# Altium PCB AD9959.PcbDoc
Units mm, origin at the board's own origin, x right, y up, seen from the top; angles counter-clockwise.
Board outline 55 x 88 mm, 2 copper layers (Top Layer, Bottom Layer); 116 components, 67 nets, 361 pads, 715 vias.
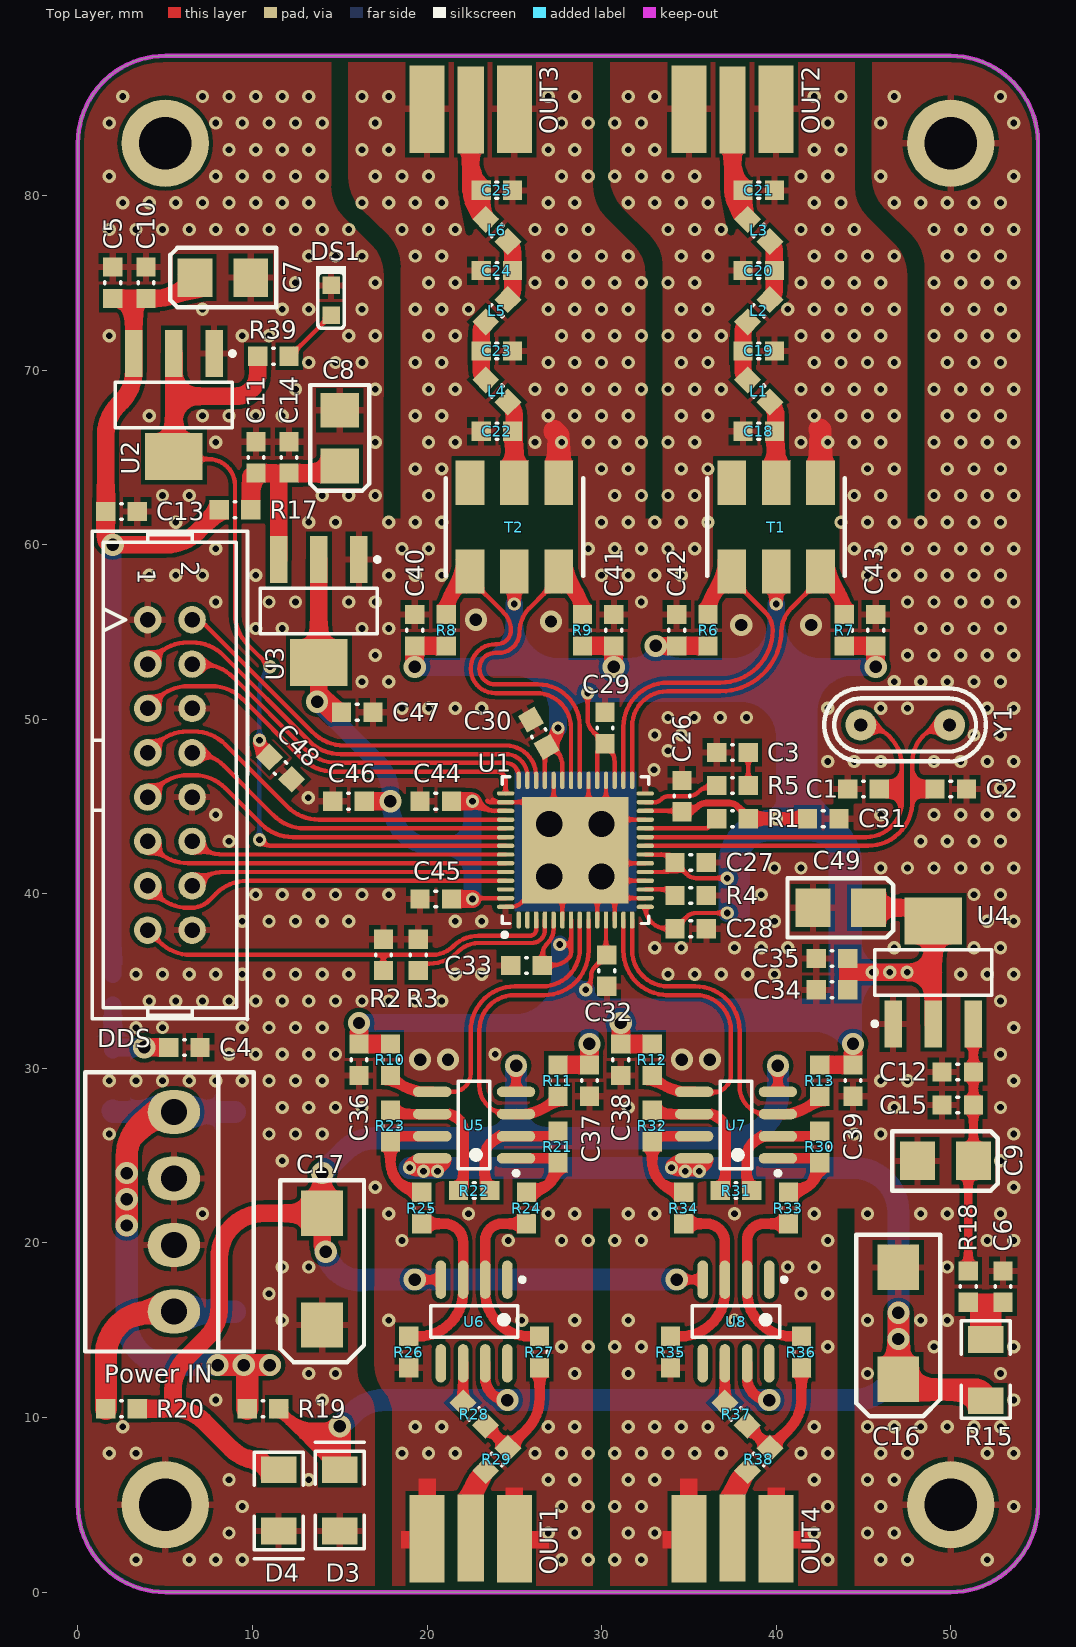
[diagram p0: Top Layer view]
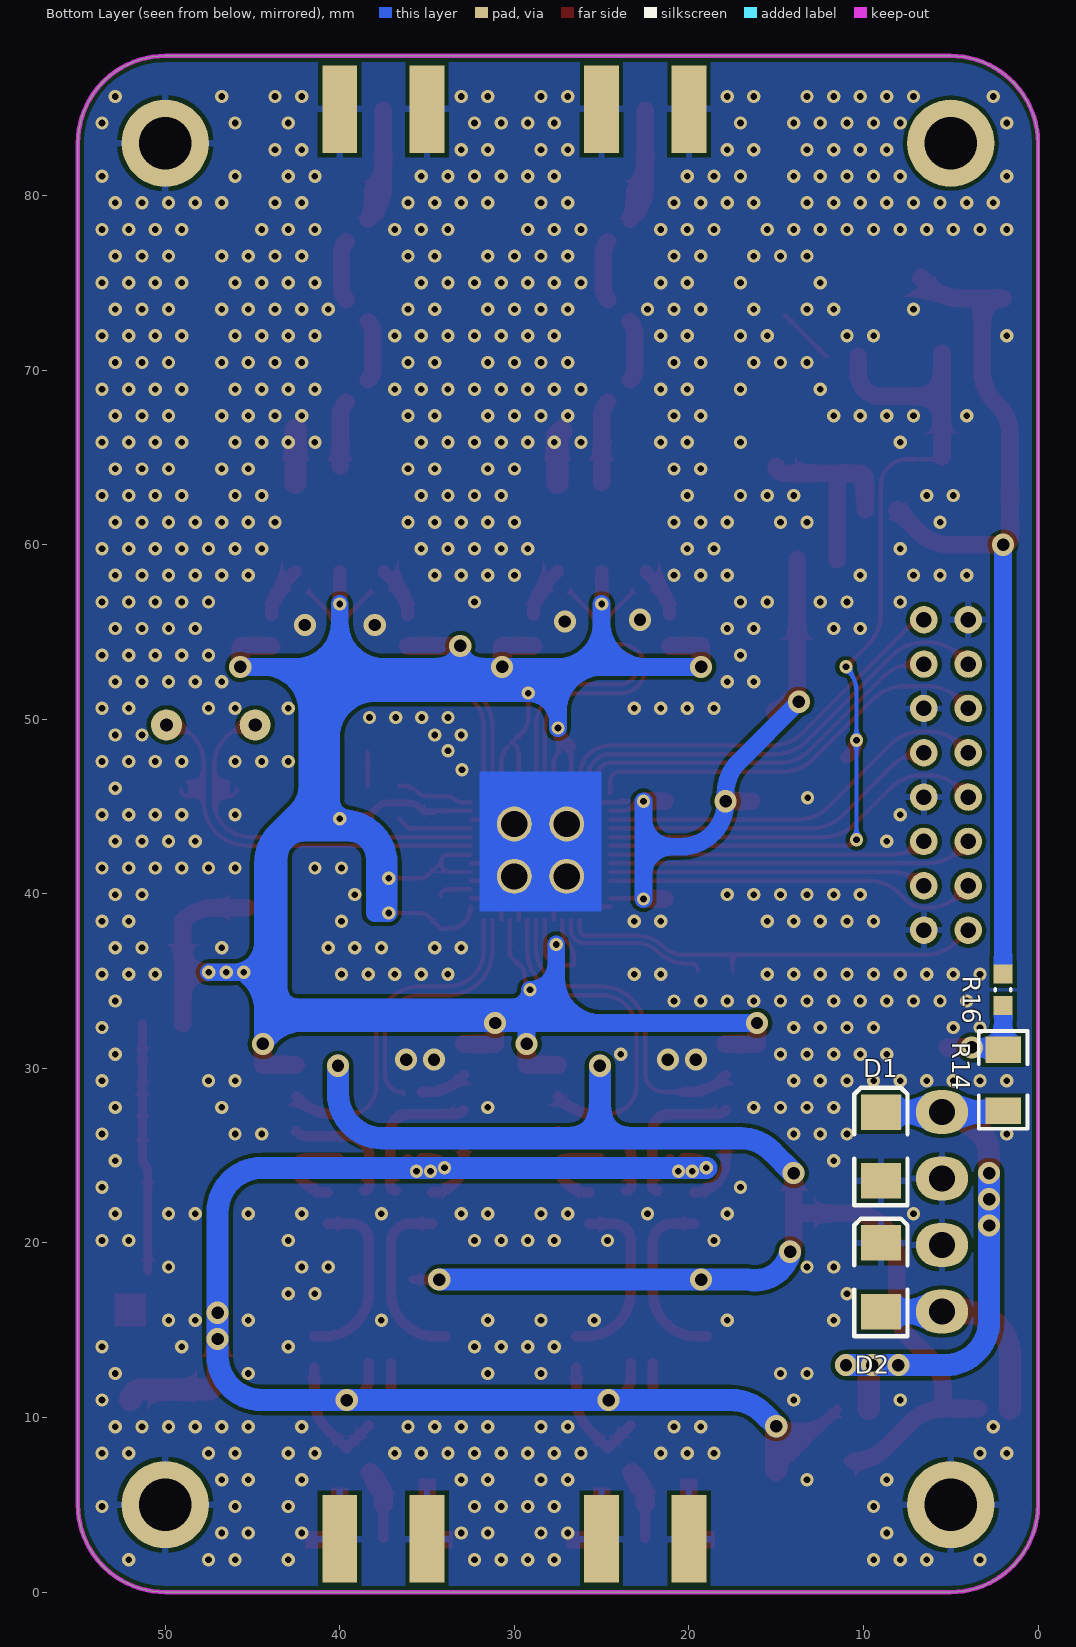
[diagram p1: Bottom Layer view, seen from below]

## Layer stack, top to bottom
Top Solder: solder mask 0.0102, Solder Resist, Dk 3.5
Top Layer: signal copper 0.0356
Dielectric 1: dielectric 0.32, FR-4, Dk 4.8
Bottom Layer: signal copper 0.0356
Bottom Solder: solder mask 0.0102, Solder Resist, Dk 3.5

## Board outline
0,5 0,83 cw(c5,83) 5,88 50,88 cw(c50,83) 55,83 55,5 cw(c50,5) 50,0 5,0 cw(c5,5)

## Design rules (kind name [scope] priority, off if disabled: settings)
Clearance [All] p1: gap=0.152 except(0.229: Arc-Poly Track-Poly SMDPad-Poly THPad-Poly Via-Poly Fill-Poly Poly-Poly Poly-Region Poly-Text)
HoleSize [All] p1: absolutevalues=TRUE maxlimit=254 minlimit=0.305 maxpercent=80.000 minpercent=20.000
MinimumSolderMaskSliver [All] p1: minsoldermaskwidth=0.025
PolygonConnect PolygonConnect_1 [IsVia] p1: connectstyle=Direct reliefconductorwidth=0.254 reliefentries=4 polygonreliefangle="90 Angle" airgapwidth=0.254
PolygonConnect [All] p2: connectstyle=Relief reliefconductorwidth=0.381 reliefentries=4 polygonreliefangle="90 Angle" airgapwidth=0.254
RoutingVias [All] p1: holewidth=0.381 width=0.762 viastyle="Through Hole" minholewidth=0.305 minwidth=0.635 maxholewidth=711.2 maxwidth=2539.975
SilkToSilkClearance [All] p1: silktosilkclearance=0.025
SilkToSolderMaskClearance [IsPad] p1: minsilkscreentomaskgap=0.076 clearancetoexposedcopper=TRUE
SolderMaskExpansion [All] p1: expansion=0.102
Width [All] p1: maxlimit=254 minlimit=0.152 preferedwidth=0.254 minimp=50.000000 maximp=50.000000 favimp=50.000000
26 further rules are at their usual default settings.

## Classes and differential pairs
component class "Decoupling Caps": C26 C27 C28 C29 C30 C31 C32 C33 C34 C35 C36 C37 C38 C39 C40 C41 C42 C43 C44 C45 C46 C47 C48 C49
component class OUTPUT: C18 C19 C20 C21 C22 C23 C24 C25 L1 L2 L3 L4 L5 L6 OUT1 OUT2 OUT3 OUT4 R21 R22 R23 R24 R25 R26 R27 R28 R29 R30 R31 R32 R33 R34 R35 R36 R37 R38 T1 T2 U5 U6 U7 U8
component class AD9959: C1 C2 C3 C4 C5 C6 C7 C8 C9 C10 C11 C12 C13 C14 C15 C16 C17 D1 D2 D3 D4 DDS DS1 "Power IN" R1 R2 R3 R4 R5 R6 R7 R8 R9 R10 R11 R12 R13 R14 R15 R16 R17 R18 R19 R20 R39 U1 U2 U3 U4 Y1

## Components (designator, comment, footprint, x,y, rotation, side; value= is the part's Value field where it differs from the comment)
C1 "39pF" CAPC0603(1608)55_M 45,46 r0 top
C2 "39pF" CAPC0603(1608)55_M 50,46 r180 top
C3 "680pF" CAPC0603(1608)55_M 37.5,48.1 r180 top
C4 "100nF" CAPC0603(1608)55_M 6.1,31.2 r180 top
C5 "100nF" CAPC0603(1608)55_M 2,75 r270 top
C6 "100nF" CAPC0603(1608)55_M 53,17.5 r270 top
C7 "10uF" CAPC3528 8.3,75.3 r0 top
C8 "10uF" CAPC3528 15,66.1 r90 top
C9 "10uF" CAPC3528 49.7,24.7 r180 top
C10 "100nF" CAPC0603(1608)55_M 3.9,75 r270 top
C11 "100nF" CAPC0603(1608)55_M 10.2,65 r270 top
C12 "100nF" CAPC0603(1608)55_M 50.4,29.8 r0 top
C13 "100nF" CAPC0603(1608)55_M 2.5,61.9 r180 top
C14 "100nF" CAPC0603(1608)55_M 12.1,65 r270 top
C15 "100nF" CAPC0603(1608)55_M 50.4,27.9 r0 top
C16 "100uF" CAPC7343 47,15.4 r90 top
C17 "100uF" CAPC7343 14,18.5 r90 top
C18 "*" CAPC0603(1608)55_M 39,66.5 r0 top
C19 "*" CAPC0603(1608)55_M 39,71.1 r180 top
C20 "*" CAPC0603(1608)55_M 39,75.7 r0 top
C21 "*" CAPC0603(1608)55_M 39,80.3 r180 top
C22 "*" CAPC0603(1608)55_M 24,66.5 r0 top
C23 "*" CAPC0603(1608)55_M 24,71.1 r180 top
C24 "*" CAPC0603(1608)55_M 24,75.7 r0 top
C25 "*" CAPC0603(1608)55_M 24,80.3 r180 top
C26 "100nF" CAPC0603(1608)55_M 34.6,45.6 r270 top
C27 "100nF" CAPC0603(1608)55_M 35.1,41.8 r180 top
C28 "100nF" CAPC0603(1608)55_M 35.1,38 r180 top
C29 "100nF" CAPC0603(1608)55_M 30.2,49.5 r270 top
C30 "100nF" CAPC0603(1608)55_M 26.4,49.2 r300 top
C31 "100nF" CAPC0603(1608)55_M 42.7,44.3 r180 top
C32 "100nF" CAPC0603(1608)55_M 30.3,35.6 r90 top
C33 "100nF" CAPC0603(1608)55_M 25.7,35.9 r0 top
C34 "100nF" CAPC0603(1608)55_M 43.2,34.5 r0 top
C35 "100nF" CAPC0603(1608)55_M 43.2,36.3 r0 top
C36 "100nF" CAPC0603(1608)55_M 16.1,30.5 r90 top
C37 "100nF" CAPC0603(1608)55_M 29.3,29.3 r90 top
C38 "100nF" CAPC0603(1608)55_M 31.1,30.5 r90 top
C39 "100nF" CAPC0603(1608)55_M 44.4,29.3 r90 top
C40 "100nF" CAPC0603(1608)55_M 19.3,55.1 r270 top
C41 "100nF" CAPC0603(1608)55_M 30.7,55.1 r270 top
C42 "100nF" CAPC0603(1608)55_M 34.3,55.1 r270 top
C43 "100nF" CAPC0603(1608)55_M 45.7,55.1 r270 top
C44 "100nF" CAPC0603(1608)55_M 20.5,45.3 r0 top
C45 "100nF" CAPC0603(1608)55_M 20.5,39.7 r0 top
C46 "100nF" CAPC0603(1608)55_M 15.5,45.3 r0 top
C47 "100nF" CAPC0603(1608)55_M 16,50.4 r180 top
C48 "100nF" CAPC0603(1608)55_M 11.6,47.2 r135 top
C49 "CAP-Pol" CAPC3528 43.7,39.2 r180 top
D1 "P6KE6.8A" DO-214AC 9,27.5 r270 bottom
D2 "P6KE6.8A" DO-214AC 9,20 r270 bottom
D3 "5.6V" LL34 15,7 r0 top
D4 "5.6V" LL34 11.5,3.5 r180 top
DDS "Header 8X2" HEADER8X2 4,55.7 r270 top (schematic designator DDS1)
DS1 "LED-BLUE" 0603LED_BLUE_V 14.5,74 r270 top
L1 "*" RESC0603(1608)_M 39,68.8 r135 top
L2 "*" RESC0603(1608)_M 39,73.4 r45 top
L3 "*" RESC0603(1608)_M 39,78 r135 top
L4 "*" RESC0603(1608)_M 24,68.8 r135 top
L5 "*" RESC0603(1608)_M 24,73.4 r45 top
L6 "*" RESC0603(1608)_M 24,78 r135 top
OUT1 "SMA" SMA-V 22.5,0.5 r90 top
OUT2 "SMA" SMA-V 37.5,87.5 r270 top
OUT3 "SMA" SMA-V 22.5,87.5 r270 top
OUT4 "SMA" SMA-V 37.5,0.5 r90 top
"Power IN" "Header 4" 3.96-4 5.5,27.5 r270 top (schematic designator "Power IN1")
R1 "1K" RESC0603(1608)_M 37.5,44.3 r180 top
R2 "1K" RESC0603(1608)_M 17.5,36.5 r270 top
R3 "1K" RESC0603(1608)_M 19.5,36.5 r270 top
R4 "2K 0.5%" RESC0603(1608)_M 35.1,39.9 r0 top
R5 "680" RESC0603(1608)_M 37.5,46.2 r0 top
R6 "49R9" RESC0603(1608)_M 36.1,55.1 r270 top
R7 "49R9" RESC0603(1608)_M 43.9,55.1 r270 top
R8 "49R9" RESC0603(1608)_M 21.1,55.1 r270 top
R9 "49R9" RESC0603(1608)_M 28.9,55.1 r270 top
R10 "49R9" RESC0603(1608)_M 17.9,30.5 r90 top
R11 "49R9" RESC0603(1608)_M 27.5,29.3 r90 top
R12 "49R9" RESC0603(1608)_M 32.9,30.5 r90 top
R13 "49R9" RESC0603(1608)_M 42.5,29.3 r90 top
R14 "600" SMD1206 2,31 r180 bottom
R15 "600" SMD1206 52,14.4 r0 top
R16 "0R" RESC0603(1608)_M 2,34.5 r90 bottom
R17 "10R" RESC0603(1608)_M 9,62 r0 top
R18 "0R" RESC0603(1608)_M 51,17.5 r90 top
R19 "10R" RESC0603(1608)_M 10.6,10.5 r0 top
R20 "10R" RESC0603(1608)_M 2.5,10.5 r0 top
R21 "100R" RESC0603(1608)_M 27.5,25.5 r270 top
R22 "200R" RESC0603(1608)_M 22.7,23 r0 top
R23 "100R" RESC0603(1608)_M 17.9,26.7 r90 top
R24 "330R" RESC0603(1608)_M 25.7,22 r270 top
R25 "330R" RESC0603(1608)_M 19.7,22 r270 top
R26 "680R" RESC0603(1608)_M 18.95,13.75 r270 top
R27 "680R" RESC0603(1608)_M 26.45,13.75 r270 top
R28 "10R" RESC0603(1608)_M 22.7,10.2 r315 top
R29 "49R9" RESC0603(1608)_M 24,7.6 r225 top
R30 "100R" RESC0603(1608)_M 42.5,25.5 r270 top
R31 "200R" RESC0603(1608)_M 37.7,23 r0 top
R32 "100R" RESC0603(1608)_M 32.9,26.7 r90 top
R33 "330R" RESC0603(1608)_M 40.7,22 r270 top
R34 "330R" RESC0603(1608)_M 34.7,22 r270 top
R35 "680R" RESC0603(1608)_M 33.95,13.75 r270 top
R36 "680R" RESC0603(1608)_M 41.45,13.75 r270 top
R37 "10R" RESC0603(1608)_M 37.7,10.2 r315 top
R38 "49R9" RESC0603(1608)_M 39,7.6 r225 top
R39 "1K" RESC0603(1608)_M 11.2,70.8 r180 top
T1 "ADTT1-1" ADTT1-1 40,61 r0 top
T2 "ADTT1-1" ADTT1-1 25,61 r0 top
U1 "AD9959" QFN56 28.5,42.5 r90 top
U2 "AMS1117-3.3" SOT-223_M 5.5,68 r270 top
U3 "AMS1117-1.8" SOT-223_M 13.8,56.2 r270 top
U4 "AMS1117-1.8" SOT-223_M 49,35.5 r90 top
U5 "OP2" SOIC8 22.7,26.75 r180 top
U6 "THS3201" SOIC8 22.7,15.5 r270 top
U7 "OP2" SOIC8 37.7,26.75 r180 top
U8 "THS3201" SOIC8 37.7,15.5 r270 top
Y1 "25MHz" HC-49S 49.927,49.677 r180 top

## Footprints (in the part's own frame and the unit in brackets; to place one, negate y for a bottom-side part, rotate by r counter-clockwise, add the part's x,y. Pads: shape width x height; smd on the part's side, far side on the other; paste and mask are expansions set on the pad)
3.96-4 [mm]
  oval 2.5x3 hole 1.5: 1(0,0) 2(3.81,0) 3(7.62,0) 4(11.43,0)
  silkscreen extent -2.29,-5.08 13.72,4.57, body extent -2.29,-5.08 13.72,4.44, height 10
0603LED_BLUE_V [mm] "SMT LED, 2-Leads, Body 1.6x0.8mm (0603-Size)"
  rect 1x1 smd paste+0 mask+0: 1(0.85,0) 2(-0.85,0)
  silkscreen extent -1.97,-0.85 1.6,0.85, body extent -0.92,-0.53 1.09,0.53, height 1.1
ADTT1-1 [mil]
  rect 65x100 smd: 1(-100,-100) 2(0,-100) 3(100,-100) 4(100,100) 5(0,100) 6(-100,100)
  silkscreen extent -155,-110 155,110, body extent -155,-110 155,110, height 112
CAPC0603(1608)55_M [mm] "Chip Capacitor, Body 1.6x0.8mm, Height 0.55mm, IPC Low Density"
  rect 1.1x1.1 smd: 1(-0.9,0) 2(0.9,0)
  silkscreen extent -0.05,-0.45 0.05,0.45, body extent -0.87,-0.47 0.88,0.48, height 0.55
CAPC3528 [mm] "SMT Capacitor, 2 Leads, Body 3.5x2.8mm"
  rect 2x2.2 smd: 1(-1.6,0) 2(1.6,0)
  silkscreen extent -3,-1.7 3.05,1.7, body extent -1.79,-1.54 1.8,1.54, height 1.9
CAPC7343 [mm] "SMT Capacitor, 2 Leads, Body 7.3x4.3mm"
  rect 2.6x2.4 smd: 1(-3.202,0.007) 2(3.198,0.007)
  silkscreen extent -5.33,-2.39 5.08,2.41, body extent -3.49,-2.03 3.51,2.04, height 2.91
DO-214AC [mil]
  rect 80x90 smd: 1(155,0) 2(0,0)
  silkscreen extent -55,-60 210,60
HC-49S [mil]
  round 70 hole 30: 1(0,0) 2(200,0)
  silkscreen extent -82,-82 282,82, body extent -83,-83 283,83, height 118
HEADER8X2 [mil]
  round 62 hole 35: 1(0,0) 2(0,100) 3(100,0) 4(100,100) 5(200,0) 6(200,100) 7(300,0) 8(300,100) 9(400,0) 10(400,100) 11(500,0) 12(500,100) 13(600,0) 14(600,100) 15(700,0) 16(700,100)
  silkscreen extent -200,-125 902,225
LL34 [mil]
  rect 80x60 smd: 1(0,-137.79) 2(0,0)
  silkscreen extent -55,-178 55,62
QFN56 [mm] "QFN, 56-Leads, Body 8x8mm, Pitch 0.5mm, Thermal Pad 6.1x6.1mm, IPC Low Density"
  oval 1x0.25 smd: 1(-4,3.25) 2(-4,2.75) 3(-4,2.25) 4(-4,1.75) 5(-4,1.25) 6(-4,0.75) 7(-4,0.25) 8(-4,-0.25) 9(-4,-0.75) 10(-4,-1.25) 11(-4,-1.75) 12(-4,-2.25) 13(-4,-2.75) 14(-4,-3.25) 29(4,-3.25) 30(4,-2.75) 31(4,-2.25) 32(4,-1.75) 33(4,-1.25) 34(4,-0.75) 35(4,-0.25) 36(4,0.25) 37(4,0.75) 38(4,1.25) 39(4,1.75) 40(4,2.25) 41(4,2.75) 42(4,3.25)
  oval 0.25x1 smd: 15(-3.25,-4) 16(-2.75,-4) 17(-2.25,-4) 18(-1.75,-4) 19(-1.25,-4) 20(-0.75,-4) 21(-0.25,-4) 22(0.25,-4) 23(0.75,-4) 24(1.25,-4) 25(1.75,-4) 26(2.25,-4) 27(2.75,-4) 28(3.25,-4) 43(3.25,4) 44(2.75,4) 45(2.25,4) 46(1.75,4) 47(1.25,4) 48(0.75,4) 49(0.25,4) 50(-0.25,4) 51(-0.75,4) 52(-1.25,4) 53(-1.75,4) 54(-2.25,4) 55(-2.75,4) 56(-3.25,4)
  rect 6.1x6.1 smd: 57(0,0)
  silkscreen extent -4.97,-4.2 4.2,4.2, body extent -4.05,-4.05 4.05,4.05, height 1
RESC0603(1608)_M [mm] "Chip Resistor, Body 1.6x0.8mm, IPC Low Density"
  rect 1.1x1.1 smd: 1(-0.9,0) 2(0.9,0)
  silkscreen extent -0.05,-0.45 0.05,0.45, body extent -0.85,-0.47 0.85,0.47, height 0.6
SMA-V [mm]
  rect 5x1.5 smd: 1(2.6,0)
  rect 5x2 smd: 2(2.55,-2.5) 2(2.55,2.5)
  rect 5x2 smd far side: 2(2.55,-2.5) 2(2.55,2.5)
SMD1206 [mil]
  rect 80x60 smd: 1(0,-135) 2(0,2.8)
  silkscreen extent -55,-175 55,45
SOIC8 [mm] "SOIC, 8-Leads, Body 4.9x3.9mm, Pitch 1.27mm, IPC Medium Density"
  oval 2.2x0.6 smd: 1(-2.4,1.905) 2(-2.4,0.635) 3(-2.4,-0.635) 4(-2.4,-1.905) 5(2.4,-1.905) 6(2.4,-0.635) 7(2.4,0.635) 8(2.4,1.905)
  silkscreen extent -2.53,-2.5 0.9,2.88, body extent -2,-2.5 2,2.5, height 1.75
SOT-223_M [mm] "SOT223, 4-Leads, Body 6.5x3.5mm, Pitch 2.3mm, Lead Span 7mm, IPC Low Density"
  rect 2.7x1 smd: 1(-2.95,2.3) 2(-2.95,0) 3(-2.95,-2.3)
  rect 2.7x3.3 smd: 2(2.95,0)
  silkscreen extent -3.07,-3.35 1.3,3.48, body extent -1.85,-3.35 1.85,3.35, height 1.8

## Part data
C1 C2 C3 C4 C5 C6 C10 C11 C12 C13 C14 C15 C18 C19 C20 C21 C22 C23 C24 C25 C26 C27 C28 C29 C30 C31 C32 C33 C34 C35 C36 C37 C38 C39 C40 C41 C42 C43 C44 C45 C46 C47 C48: library part CAP
C7 C8 C9 C16 C17: library part CAP-Pol
D1 D2: library part Diode
D3 D4: library part "D Zener", "Zener Diode"
DDS: "Header, 8-Pin, Dual row"
L1 L2 L3 L4 L5 L6: library part Inductor
"Power IN": "Header, 4-Pin"
R1 R2 R3 R4 R5 R6 R7 R8 R9 R10 R11 R12 R13 R16 R17 R18 R19 R20 R21 R22 R23 R24 R25 R26 R27 R28 R29 R30 R31 R32 R33 R34 R35 R36 R37 R38 R39: library part RES
R14 R15: library part "Ferrite Bead", "Ferrite Bead"
U2 U3 U4: library part AMS1117
Y1: library part XTAL, "Crystal Oscillator"

## Free pads (board coordinates)
  round 2 hole 1.5: 0(27,41) 0(27,44) 0(30,41) 0(30,44)
  round 5 hole 3: 1(5,83) 1(50,83) 2(5,5) 3(50,5)

## Via types
v1: diameter 0.762, hole 0.381, Top Layer to Bottom Layer, tented both sides, 678 vias
v2: diameter 1.27, hole 0.711, Top Layer to Bottom Layer, tented both sides, 37 vias

## Nets (pads, with @x,y where several pads share a name; then routed paths per layer and width w, separated by ;. In a path a pad name is that pad's centre, name@x,y a point inside that pad or via, vN(x,y) a via of type N, cw(c..) or ccw(c..) an arc to the next point about the centre after c; other vN are vias at no path point)
1.8VA: C26.2 C27.2 C28.2 C29.2 C30.2 C31.2 C32.2 C33.2 C34.2 C35.2 C36.2 C37.2 C38.2 C39.2 C40.2 C41.2 C42.2 C43.2 C49.1 R1.1 R6.2 R7.2 R8.2 R9.2 R10.2 R11.2 R12.2 R13.2 T1.2 T2.2 U1.5 U1.7 U1.11 U1.15 U1.19 U1.21 U1.26 U1.31 U1.33 U1.37 U1.39 U4.2 | length 339
  Top Layer w0.25: U1.26 34.55,44.75 C26.2
  Top Layer w0.254: U1.39 26.75,48.179 cw(c27.091,48.179) C30.2 ; U1.5 27.25,37.991 cw(c26.109,37.991) 26.916,37.184 ccw(c27.678,36.422) 26.6,36.422 C33.2 27.134,35.9 ccw(c27.134,37.266) 28.1,36.3 ccw(c27.738,36.662) 28.25,36.662 28.25,37.1 ; C30.2@27.4,48.2 cw(c26.555,47.355) 27.75,47.355 U1.37 ; v1(27.6,37.1) 28.25,37.1 ; U1.7 28.25,37.1 ; v1(29.1,34.5) ccw(c28.376,35.224) 29.4,35.224 29.4,35.3 cw(c30.124,35.3) 29.612,35.812 C32.2 cw(c30.421,36.621) 30.25,36.621 U1.11 ; v1(29.2,51.5) 29.2,50 ccw(c30.166,50) 29.483,49.317 ; 29.483,49.317 C29.2 ; U1.33 29.75,47.996 cw(c30.604,47.996) 30,48.6 C29.2@30.006,48.594 ; C29.2@30.4,48.4 cw(c29.555,47.555) 30.75,47.555 U1.31 ; U1.15 ccw(c33.75,39.25) 33.75,38 C28.2 34.888,38.688 cw(c35.4,38.176) 35.4,38.9 v1(37.2,38.9) ; U1.19 33.65,41.25 ccw(c33.65,41.8) C27.2 ; U1.21 33.75,42.25 cw(c33.75,41.8) C27.2 ; v1(37.2,40.9) 35.4,40.9 cw(c35.4,41.624) 34.888,41.112 C27.2
  Top Layer w0.381: C26.2 34.776,44.7 ccw(c34.776,45.724) 35.5,45 cw(c35.983,44.517) 35.983,45.2 37.317,45.2 cw(c37.317,44.517) 37.8,45 38.329,44.471 cw(c38.159,44.3) R1.1
  Top Layer w0.762: v1(25,56.6) 25,56.7 T2.2 ; C30.2 27.196,48.767 ccw(c26.463,49.5) v1(27.5,49.5) ; R1.1 C31.2 ; v1(40,56.6) T1.2
  Top Layer w1.016: v2(16.1,32.6) C36.2 R10.2 ; v2(19.3,53) C40.2 R8.2 ; R11.2 C37.2 v2(29.3,31.4) ; R9.2 C41.2 v2(30.7,53) ; v2(31.1,32.6) C38.2 R12.2 ; v2(33.1,54.2) C42.2 R6.2 ; R13.2 C39.2 v2(44.4,31.4) ; R7.2 C43.2 v2(45.7,53) ; C34.2 44.1,35.5 ; C35.2 44.1,35.5 ; C49.1 47.198,39.2 cw(c47.198,36.66) 48.994,38.456 49,38.45 49,35.5 ; U4.2@49,32.55 49,35.5 ; 44.1,35.5 49,35.5
  Bottom Layer w1.016: v2(16.1,32.6) 25.06,32.6 ; v2(19.3,53) 22.46,53 ; v1(25,56.6) 25,55.54 ; v1(27.5,49.5) v1@27.5,49.8 ; v1(27.6,37.1) 27.6,36 ; v2(29.3,31.4) 29.3,32.359 cw(c29.641,32.359) 29.4,32.6 ; v2(33.1,54.2) 33.1,53 ; 39.4,44.3 ccw(c39.4,45.4) 40.5,45.4 40.5,48.96 ccw(c37.96,48.96) 40.186,50.183 ; v1(40,56.6) 40,55.54 ; 43.6,53 42.54,53 ; v2(45.7,53) 44.4,53 ; v1(47.5,35.5) v1(46.5,35.5) 46.1,35.5 ; 22.46,53 ccw(c22.46,55.54) 25,55.54 ; 22.46,53 24.96,53 ; 24.96,53 cw(c24.96,50.46) 27.5,50.46 ; 24.96,53 25,53 ; 25,53 25,55.5 ; 25,53 27.5,53 ; 25,55.5 ccw(c27.5,55.5) 27.5,53 ; 25,55.5 25,55.54 ; 25.06,32.6 ccw(c25.06,35.14) 27.6,35.14 ; 25.06,32.6 27.6,32.6 ; v1@27.5,49.8 cw(c29.2,49.8) v1(29.2,51.5) ; v1@27.5,49.8 27.5,50.46 ; 27.5,50.46 27.5,50.8 ; 27.5,50.8 ccw(c27.5,51.3) 28,51.3 28,52.2 ; 27.5,50.8 27.5,52.2 ; 27.5,52.2 27.5,53 ; 27.5,52.2 28,52.2 ; 27.5,53 29.2,53 ; 27.6,32.6 27.6,35.14 ; 27.6,32.6 28.4,32.6 ; 27.6,35.14 27.6,36 ; 27.6,36 ccw(c29.1,36) 28.389,34.679 ; 28,52.2 29.2,52.2 ; 28.389,34.679 ccw(c29.1,36) 28.4,34.673 ; 28.389,34.679 28.4,34.679 28.4,34.673 ; 28.4,32.6 29.4,32.6 ; 28.4,32.6 28.4,34.673 ; 28.4,34.673 ccw(c29.1,36) v1(29.1,34.5) ; v1(29.1,34.5) ccw(c30.1,34.5) 30.1,33.5 42.4,33.5 ccw(c42.4,34.6) 43.5,34.6 43.5,42 ccw(c42,42) 42,43.5 39.5,43.5 ccw(c39.5,42) 38,42 38,38.9 v1(37.2,38.9) v1(37.2,40.9) 37.2,41.76 cw(c39.74,41.76) 39.74,44.3 v1(40,44.3) ; v1(29.1,34.5) 29.1,32.9 ccw(c29.4,32.9) 29.4,32.6 ; v1(29.2,51.5) cw(c30.7,51.5) 29.431,52.3 ; v1(29.2,51.5) 37.96,51.5 cw(c37.96,48.96) 40.186,50.183 ; v1(29.2,51.5) 29.2,52.2 ; 29.2,52.2 29.2,52.3 ; 29.2,52.3 29.2,53 ; 29.2,52.3 29.431,52.3 ; 29.2,53 v2(30.7,53) ; 29.4,32.6 v2(31.1,32.6) 42.148,32.6 ; 29.431,52.3 cw(c30.7,51.5) v2(30.7,53) ; 29.431,52.3 38.069,52.3 ; v2(30.7,53) 33.1,53 ; 33.1,53 37.46,53 ; 37.46,53 ccw(c37.46,55.54) 40,55.54 ; 37.46,53 39.32,53 ; 38.069,52.3 cw(c38.069,50.183) 40.186,50.183 ; 38.069,52.3 38.66,52.3 cw(c38.66,49.76) 41.2,49.76 41.2,44.739 ; 39.32,53 cw(c39.32,50.46) 41.86,50.46 ; 39.32,53 40,53 ; v1(40,44.3) ccw(c40,46.16) 41.2,44.739 ; v1(40,44.3) 41.1,44.3 ; 40,53 41.9,53 ; 40,53 40,55.54 ; 40,55.54 ccw(c42.54,55.54) 42.54,53 ; 41.1,44.3 ccw(c41.1,44.4) 41.2,44.4 41.2,44.739 ; 41.1,44.3 41.86,44.3 ; 41.2,44.739 ccw(c40,46.16) 41.86,46.16 ; 41.86,44.3 cw(c41.86,41.76) 43.608,43.603 ; 41.86,44.3 41.86,46.16 ; 41.86,46.16 ccw(c43.813,46.16) 42.432,44.779 43.608,43.603 ; 41.86,46.16 41.86,50.46 ; 41.86,50.46 cw(c44.4,50.46) 44.4,53 ; 41.86,50.46 41.86,52.96 cw(c41.9,52.96) 41.9,53 ; 41.9,53 42.54,53 ; 42.148,32.6 cw(c42.148,30.06) 43.944,31.856 v2(44.4,31.4) 44.4,32.6 ; 42.148,32.6 ccw(c42.148,34.852) 44.4,34.852 ; 42.148,32.6 44.4,32.6 ; 42.54,53 44.4,53 ; 43.608,43.603 cw(c41.86,41.76) 44.4,41.76 44.4,37.2 ; 44.4,32.6 44.4,33.348 ; 44.4,33.348 cw(c46.94,33.348) 45.144,35.144 v1(45.5,35.5) 46.1,35.5 ; 44.4,33.348 44.4,34.852 ; 44.4,34.852 44.4,37.2 ; 44.4,37.2 ccw(c46.1,37.2) 46.1,35.5
1.8VD: C44.2 C45.2 C46.2 C47.2 U1.45 U1.55 U3.2 | length 41.5
  Top Layer w0.254: v1(22.6,39.7) cw(c22.721,39.579) 22.721,39.75 U1.55 ; v1(22.6,45.3) ccw(c23.928,46.628) 23.928,44.75 U1.45
  Top Layer w1.016: U3.2@13.8,59.15 13.8,53.25 13.8,51.7 ccw(c15.1,51.7) C47.2 ; C46.2 17.7,45.3 v2(17.9,45.3) ; C45.2 v1(22.6,39.7) ; C44.2 v1(22.6,45.3)
  Bottom Layer w1.016: v2(13.7,51) 17.156,47.544 cw(c15.36,45.748) 17.9,45.748 v2(17.9,45.3) 17.9,45.24 ccw(c20.44,45.24) 20.44,42.7 21,42.7 ; v1(22.6,39.7) 22.6,41.1 ; v1(22.6,45.3) 22.6,44.3 ; 21,42.7 ccw(c21,44.3) 22.6,44.3 ; 21,42.7 cw(c21,41.1) 22.6,41.1 ; 21,42.7 22.6,42.7 ; 22.6,41.1 22.6,42.7 ; 22.6,42.7 22.6,44.3
3.3VD: C48.2 R39.2 U1.49 U2.2 | length 53.4
  Top Layer w0.25: v1@10.5,43 ccw(c11.104,43.604) 11.104,42.75 U1.49
  Top Layer w0.254: U2.2@5.5,65.05 ccw(c5.65,65.05) 5.65,64.9 7.5,64.9 cw(c7.5,63.4) 9,63.4 9,56.052 ccw(c11.54,56.052) 9.744,54.256 v1(11,53) ; v1(10.4,43.1) v1@10.5,43
  Top Layer w0.762: v1(10.4,48.8) ccw(c11.366,48.8) 10.683,48.117 C48.2
  Top Layer w1.016: U2.2@5.5,65.05 5.5,68.5 ; U2.2@5.5,70.95 5.5,68.5 ; R39.2 10.3,69.8 cw(c9,69.8) 9,68.5 5.5,68.5
  Bottom Layer w0.254: v1(10.4,43.1) v1(10.4,48.8) 10.4,51.551 cw(c12.449,51.551) v1(11,53)
+5VA: C16.1 D3.2 R15.1 R19.2 U5.8 U6.7 U7.8 U8.7 | length 114.9
  Top Layer w0.508: R19.2 11.806,10.194 ccw(c13.602,11.99) 13.602,9.45 ; R19.2@11.6,10.3 12.45,9.45 ; D3.2@14.5,7.4 13.9,8 ; 15,8.1 cw(c14.759,8.341) 14.759,8 13.9,8 ; v2(15,9.5) cw(c14.879,9.621) 14.879,9.45 13.602,9.45 ; 12.45,9.45 12.9,9 ; 12.45,9.45 13.602,9.45 ; 12.9,9 13.4,8.5 ; 12.9,9 14.517,9 cw(c14.517,8.317) 15,8.8 cw(c14.276,9.524) 14.276,8.5 13.4,8.5 ; 13.4,8.5 13.9,8
  Top Layer w0.61: U5.8 19.833,24.845 ccw(c19.833,23.667) 19,24.5 v1(19,24.3) ; U5.8@21.1,24.8 cw(c20.617,24.8) 20.959,24.459 ; U6.7 23.335,12.265 ccw(c24.6,12.265) v2(24.6,11) ; U7.8 34.833,24.845 ccw(c34.833,23.667) 34,24.5 v1(34,24.3) ; U7.8@36.1,24.8 cw(c35.617,24.8) 35.959,24.459 ; U8.7 38.335,12.265 ccw(c39.6,12.265) v2(39.6,11) ; v1(19,24.3) cw(c19.383,23.917) 19.383,24.459 20.959,24.459 ; v1(19,24.3) ccw(c19.483,24.783) 19.483,24.1 v1(19.8,24.1) v1(20.6,24.1) 20.959,24.459 ; v1(34,24.3) ccw(c34.483,24.783) 34.483,24.1 v1(34.8,24.1) v1(35.6,24.1) 35.959,24.459 ; v1(34,24.3) cw(c34.383,23.917) 34.383,24.459 35.959,24.459
  Top Layer w1.27: D3.2 15,8.1 15,8.8 v2(15,9.5) ; C16.1 47,12.198 v2(47,14.5) v2(47,16) ; C16.1@47.4,11.6 51.371,11.6 cw(c51.371,10.971) R15.1
  Bottom Layer w1.27: v2(15,9.5) 15.756,10.256 cw(c17.552,8.46) 17.552,11 v2(24.6,11) v2(39.6,11) 44.46,11 ccw(c44.46,13.54) 47,13.54 v2(47,14.5) v2(47,16) 47,21.76 ccw(c44.46,21.76) 44.46,24.3 v1(34,24.3) v1(19,24.3)
-5VA: C17.2 D4.1 R20.2 U5.4 U6.4 U7.4 U8.4 | length 90.9
  Top Layer w0.508: D4.1@10.552,7.5 D4.1@10.9,7.5 ; v2(19.3,17.9) U6.4 ; U5.4 v2(25.1,30.15) ; v2(34.3,17.9) U8.4 ; U7.4 v2(40.1,30.15)
  Top Layer w1.016: R20.2 5.448,10.5 ; D4.1@10.552,7.5 cw(c10.552,10.04) 8.756,8.244 7.244,9.756 ccw(c5.448,7.96) 5.448,10.5 ; v2(14,24) 13.993,23.993 C17.2 ; v2(14.2,19.5) cw(c14.7,20) 13.993,20 C17.2 ; 5.448,10.5 5.448,11.596 cw(c7.988,11.596) 6.192,13.392 7.356,14.556 ccw(c5.56,16.352) 8.1,16.352 8.1,19.158 cw(c10.64,19.158) 10.64,21.698 C17.2
  Bottom Layer w1.27: v2(14,24) 15.256,25.256 cw(c17.052,23.46) 17.052,26 25.1,26 ; v2(14.2,19.5) ccw(c16.2,19.9) 16.6,17.9 v2(19.3,17.9) v2(34.3,17.9) ; v2(25.1,30.15) 25.1,26 ; v2(40.1,30.15) 40.1,28.54 cw(c37.56,28.54) 37.56,26 25.1,26
CH0_IOUT: R6.1 T1.1 U1.30 | length 20.5
  Top Layer w0.25: U1.30 31.25,49.56 cw(c33.79,49.56) 33.79,52.1 36.8,52.1 ccw(c36.8,55.1) 39.8,55.1 ccw(c38.351,55.1) 39.376,56.124 T1.1@38.2,57.3
  Top Layer w0.762: R6.1 36.1,56.048 cw(c38.64,56.048) 36.844,57.844 T1.1
CH0_IOUTN: R7.1 T1.3 U1.29 | length 20.5
  Top Layer w0.25: U1.29 31.75,49.6 cw(c33.75,49.6) 33.75,51.6 36.8,51.6 ccw(c36.8,55.1) 40.3,55.1 ; 40.3,55 cw(c42.231,55) 40.866,56.366 T1.3@41.8,57.3
  Top Layer w0.762: T1.3 43.156,57.844 cw(c41.36,56.048) 43.9,56.048 R7.1
CH1_IOUT: R8.1 T2.1 U1.36 | length 20
  Top Layer w0.25: T2.1@23.2,57.3 24.376,56.124 cw(c23.351,55.1) 24.8,55.1 cw(c24,55.1) 24,54.3 23.9,54.3 ccw(c23.9,52.9) 22.5,52.9 ccw(c23.9,52.9) 23.9,51.5 26.25,51.5 cw(c26.25,49.5) 28.25,49.5 U1.36
  Top Layer w0.762: R8.1 21.1,56.048 cw(c23.64,56.048) 21.844,57.844 T2.1
CH1_IOUTN: R9.1 T2.3 U1.35 | length 20
  Top Layer w0.25: T2.3@26.8,57.3 25.866,56.366 ccw(c27.231,55) 25.3,55 cw(c24.1,55) 24.1,53.8 23.9,53.8 ccw(c23.9,52.9) 23,52.9 ccw(c23.9,52.9) 23.9,52 26.35,52 cw(c26.35,49.6) 28.75,49.6 U1.35
  Top Layer w0.762: T2.3 28.156,57.844 cw(c26.36,56.048) 28.9,56.048 R9.1
CH2_IOUT: R10.1 U1.8 U5.5 | length 18.5
  Top Layer w0.25: U5.5 21.455,28.655 ccw(c21.455,29.7) 22.5,29.7 22.5,32.16 cw(c25.04,32.16) 25.04,34.7 26.605,34.7 ccw(c26.605,36.85) 28.755,36.85 U1.8@28.755,38.5
  Top Layer w0.6: R10.1 18.101,29.399 ccw(c19.897,31.195) 19.897,28.655 U5.5
CH2_IOUTN: R11.1 U1.9 U5.3 | length 19
  Top Layer w0.25: U5.3@24.6,27.4 cw(c24.6,29) 23,29 23,32.2 cw(c25,32.2) 25,34.2 26.715,34.2 ccw(c26.715,36.74) 29.255,36.74 U1.9@29.255,38.5
  Top Layer w0.6: U5.3 25.433,27.385 ccw(c25.433,29.925) 27.229,28.129 R11.1
CH3_IOUT: R12.1 U1.13 U7.5 | length 17.4
  Top Layer w0.25: U1.13 31.25,36.74 ccw(c33.79,36.74) 33.79,34.2 ; 33.69,34.2 35.405,34.2 cw(c35.405,32.2) 37.405,32.2 ; U7.5@36.36,28.615 ccw(c36.36,29.66) 37.405,29.66 37.405,32.12
  Top Layer w0.6: R12.1 33.101,29.399 ccw(c34.897,31.195) 34.897,28.655 U7.5
CH3_IOUTN: R13.1 U1.14 U7.3 | length 18.9
  Top Layer w0.25: U1.14 31.75,36.75 ccw(c33.8,36.75) 33.8,34.7 35.365,34.7 cw(c35.365,32.16) 37.905,32.16 37.905,28.96 ccw(c39.505,28.96) U7.3@39.505,27.36
  Top Layer w0.6: U7.3 40.433,27.385 ccw(c40.433,29.925) 42.229,28.129 R13.1
CLKSEL: R1.2 U1.24 | length 4.3
  Top Layer w0.25: U1.24 36.05,43.75 R1.2
CS: DDS.8 U1.47 | length 19.5
  Top Layer w0.25: DDS.8 6.568,48.08 cw(c6.568,45.54) 8.364,47.336 11.206,44.494 ccw(c13.002,46.29) 13.002,43.75 U1.47
GND: "Power IN.2" "Power IN.3" C1.1 C2.1 C3.2 C4.1 C5.1 C6.1 C7.2 C8.2 C9.2 C10.1 C11.1 C12.1 C13.1 C14.1 C15.1 C16.2 C17.1 C18.1 C19.1 C20.1 C21.1 C22.1 C23.1 C24.1 C25.1 C26.1 C27.1 C28.1 C29.1 C30.1 C31.1 C32.1 C33.1 C34.1 C35.1 C36.1 C37.1 C38.1 C39.1 C40.1 C41.1 C42.1 C43.1 C44.1 C45.1 C46.1 C47.1 C48.1 C49.2 D1.1 D2.2 D3.1 D4.2 DDS.1 DDS.6 DDS.10 DDS.16 DS1.2 OUT1.2 OUT2.2 OUT3.2 OUT4.2 pad.0 pad.1@50,83 pad.2 pad.3 R2.1 R3.1 R4.2 R26.2 R35.2 T1.4 T2.4 U1.6 U1.10 U1.12 U1.16 U1.18 U1.20 U1.25 U1.28 U1.32 U1.34 U1.38 U1.44 U1.56 U1.57 U2.1 U3.1 U4.1 | length 50.5
  Top Layer w0.254: 23.445,45.324 ccw(c23.624,45.503) 23.624,45.25 U1.44@24.125,45.25 ; 23.768,45.398 ccw(c24.125,45.755) U1.44@24.125,45.25 ; U1.56 24.796,39.25 ccw(c24.796,40.104) 25.4,39.5 28.329,42.429 cw(c28.5,42.259) U1.57 ; U1.38 U1.57@27.25,43.75 ; U1.6 27.75,41.75 U1.57 ; U1.34 U1.57@29.25,43.25 ; U1.10 U1.57@29.75,41.25 ; U1.32 U1.57@30.25,44.25 ; U1.12 U1.57@30.75,40.25 ; U1.16 31.25,39.75 U1.57@30.75,40.25 ; U1.18 U1.57@30.25,40.75 ; U1.20 U1.57@29.25,41.75 ; U1.25 U1.57@30.25,44.25 ; U1.44@24.125,45.25 U1.44 25.75,45.25 U1.57@27.25,43.75 ; U1.57@27.25,43.75 U1.57 ; U1.57 U1.57@29.25,41.75 ; U1.57 U1.57@29.25,43.25 ; U1.57@29.25,41.75 U1.57@29.75,41.25 ; U1.57@29.25,43.25 U1.57@30.25,44.25 ; U1.57@29.75,41.25 U1.57@30.25,40.75 ; U1.57@30.25,40.75 U1.57@30.75,40.25
  Top Layer w1.27: 27.3,66.5 27.54,66.26 T2.4 ; 42.5,66.6 42.54,66.56 T1.4
  other v1: 3.324,1.857 6.372,1.857 7.896,1.857 9.42,1.857 27.708,1.857 29.232,1.857 30.756,1.857 32.28,1.857 42.948,1.857 45.996,1.857 47.52,1.857 52.092,1.857 8.658,3.381 26.946,3.381 28.47,3.381 31.518,3.381 33.042,3.381 42.186,3.381 45.234,3.381 46.758,3.381 9.42,4.905 27.708,4.905 29.232,4.905 30.756,4.905 32.28,4.905 42.948,4.905 45.996,4.905 53.616,4.905 8.658,6.429 13.23,6.429 26.946,6.429 28.47,6.429 31.518,6.429 33.042,6.429 42.186,6.429 45.234,6.429 46.758,6.429 1.8,7.953 3.324,7.953 18.564,7.953 20.088,7.953 21.612,7.953 26.184,7.953 27.708,7.953 29.232,7.953 30.756,7.953 32.28,7.953 33.804,7.953 35.328,7.953 36.852,7.953 41.424,7.953 42.948,7.953 45.996,7.953 47.52,7.953 52.092,7.953 53.616,7.953 2.562,9.477 19.326,9.477 20.85,9.477 26.946,9.477 28.47,9.477 31.518,9.477 33.042,9.477 34.566,9.477 36.09,9.477 42.186,9.477 45.234,9.477 46.758,9.477 48.282,9.477 49.806,9.477 51.33,9.477 52.854,9.477 7.896,11.001 13.992,11.001 53.616,11.001 13.23,12.525 14.754,12.525 28.47,12.525 31.518,12.525 45.234,12.525 52.854,12.525 27.708,14.049 29.232,14.049 30.756,14.049 32.28,14.049 42.948,14.049 49.044,14.049 53.616,14.049 11.706,15.573 17.802,15.573 25.422,15.573 28.47,15.573 31.518,15.573 37.614,15.573 45.234,15.573 48.282,15.573 49.806,15.573 10.944,17.097 41.424,17.097 42.948,17.097 11.706,18.621 13.23,18.621 40.662,18.621 42.186,18.621 49.806,18.621 18.564,20.145 24.66,20.145 27.708,20.145 29.232,20.145 30.756,20.145 32.28,20.145 42.948,20.145 52.092,20.145 53.616,20.145 7.134,21.669 17.802,21.669 22.374,21.669 26.946,21.669 28.47,21.669 31.518,21.669 33.042,21.669 37.614,21.669 42.186,21.669 45.234,21.669 48.282,21.669 49.806,21.669 52.854,21.669 17.04,23.193 53.616,23.193 11.706,24.717 52.854,24.717 1.8,26.241 10.944,26.241 12.468,26.241 13.992,26.241 44.472,26.241 45.996,26.241 53.616,26.241 11.706,27.765 13.23,27.765 14.754,27.765 16.278,27.765 31.518,27.765 46.758,27.765 52.854,27.765 1.8,29.289 3.324,29.289 4.848,29.289 6.372,29.289 7.896,29.289 9.42,29.289 10.944,29.289 12.468,29.289 13.992,29.289 45.996,29.289 47.52,29.289 53.616,29.289 8.658,30.813 10.182,30.813 11.706,30.813 13.23,30.813 14.754,30.813 23.898,30.813 52.854,30.813 3.324,32.337 4.848,32.337 9.42,32.337 10.944,32.337 12.468,32.337 13.992,32.337 53.616,32.337 4.086,33.861 5.61,33.861 7.134,33.861 8.658,33.861 10.182,33.861 11.706,33.861 13.23,33.861 14.754,33.861 16.278,33.861 17.802,33.861 19.326,33.861 20.85,33.861 52.854,33.861 3.324,35.385 4.848,35.385 6.372,35.385 7.896,35.385 9.42,35.385 10.944,35.385 12.468,35.385 13.992,35.385 15.516,35.385 21.612,35.385 23.136,35.385 33.804,35.385 35.328,35.385 36.852,35.385 38.376,35.385 39.9,35.385 50.568,35.385 52.092,35.385 53.616,35.385 33.042,36.909 34.566,36.909 37.614,36.909 39.138,36.909 40.662,36.909 46.758,36.909 51.33,36.909 52.854,36.909 9.42,38.433 10.944,38.433 12.468,38.433 13.992,38.433 15.516,38.433 21.612,38.433 23.136,38.433 39.9,38.433 52.092,38.433 53.616,38.433 10.182,39.957 11.706,39.957 13.23,39.957 14.754,39.957 16.278,39.957 17.802,39.957 39.138,39.957 51.33,39.957 52.854,39.957 39.9,41.481 41.424,41.481 45.996,41.481 47.52,41.481 49.044,41.481 50.568,41.481 52.092,41.481 53.616,41.481 8.658,43.005 48.282,43.005 49.806,43.005 51.33,43.005 52.854,43.005 7.896,44.529 45.996,44.529 49.044,44.529 50.568,44.529 52.092,44.529 53.616,44.529 13.2,45.5 52.854,46.053 33,47.1 42.948,47.577 44.472,47.577 45.996,47.577 49.044,47.577 50.568,47.577 52.092,47.577 53.616,47.577 33.8,48.2 33.042,49.101 34.566,49.101 51.33,49.101 52.854,49.101 33.8,50.1 35.3,50.1 36.8,50.1 38.3,50.1 18.564,50.625 20.088,50.625 21.612,50.625 23.136,50.625 42.948,50.625 45.996,50.625 47.52,50.625 52.092,50.625 53.616,50.625 16.278,52.149 17.802,52.149 46.758,52.149 48.282,52.149 49.806,52.149 51.33,52.149 52.854,52.149 17.04,53.673 47.52,53.673 49.044,53.673 50.568,53.673 52.092,53.673 53.616,53.673 10.182,55.197 11.706,55.197 16.278,55.197 17.802,55.197 48.282,55.197 49.806,55.197 51.33,55.197 52.854,55.197 7.896,56.721 10.944,56.721 12.468,56.721 15.516,56.721 17.04,56.721 32.28,56.721 47.52,56.721 49.044,56.721 50.568,56.721 52.092,56.721 53.616,56.721 4.086,58.245 5.61,58.245 7.134,58.245 10.182,58.245 17.802,58.245 19.326,58.245 20.85,58.245 29.994,58.245 31.518,58.245 33.042,58.245 34.566,58.245 45.234,58.245 46.758,58.245 48.282,58.245 49.806,58.245 51.33,58.245 52.854,58.245 7.896,59.769 18.564,59.769 20.088,59.769 29.232,59.769 30.756,59.769 32.28,59.769 33.804,59.769 35.328,59.769 44.472,59.769 45.996,59.769 47.52,59.769 49.044,59.769 50.568,59.769 52.092,59.769 53.616,59.769 5.61,61.293 13.23,61.293 14.754,61.293 17.802,61.293 19.326,61.293 20.85,61.293 29.994,61.293 31.518,61.293 33.042,61.293 34.566,61.293 36.09,61.293 43.71,61.293 45.234,61.293 46.758,61.293 48.282,61.293 49.806,61.293 51.33,61.293 52.854,61.293 4.848,62.817 6.372,62.817 13.992,62.817 15.516,62.817 17.04,62.817 20.088,62.817 30.756,62.817 32.28,62.817 33.804,62.817 35.328,62.817 44.472,62.817 45.996,62.817 49.044,62.817 50.568,62.817 52.092,62.817 53.616,62.817 19.326,64.341 20.85,64.341 29.994,64.341 31.518,64.341 34.566,64.341 36.09,64.341 45.234,64.341 46.758,64.341 49.806,64.341 51.33,64.341 52.854,64.341 7.896,65.865 17.04,65.865 20.088,65.865 21.612,65.865 26.184,65.865 27.708,65.865 29.232,65.865 30.756,65.865 32.28,65.865 33.804,65.865 35.328,65.865 41.424,65.865 42.948,65.865 44.472,65.865 45.996,65.865 49.044,65.865 50.568,65.865 52.092,65.865 53.616,65.865 4.086,67.389 7.134,67.389 8.658,67.389 10.182,67.389 11.706,67.389 19.326,67.389 20.85,67.389 26.946,67.389 28.47,67.389 29.994,67.389 31.518,67.389 34.566,67.389 36.09,67.389 42.186,67.389 43.71,67.389 45.234,67.389 46.758,67.389 49.806,67.389 51.33,67.389 52.854,67.389 12.468,68.913 17.04,68.913 20.088,68.913 21.612,68.913 26.184,68.913 27.708,68.913 29.232,68.913 30.756,68.913 32.28,68.913 33.804,68.913 35.328,68.913 36.852,68.913 41.424,68.913 42.948,68.913 44.472,68.913 45.996,68.913 49.044,68.913 50.568,68.913 52.092,68.913 53.616,68.913 13.23,70.437 14.754,70.437 16.278,70.437 19.326,70.437 20.85,70.437 26.946,70.437 28.47,70.437 29.994,70.437 31.518,70.437 34.566,70.437 36.09,70.437 42.186,70.437 43.71,70.437 45.234,70.437 46.758,70.437 49.806,70.437 51.33,70.437 52.854,70.437 1.8,71.961 9.42,71.961 10.944,71.961 15.516,71.961 17.04,71.961 20.088,71.961 21.612,71.961 27.708,71.961 29.232,71.961 30.756,71.961 32.28,71.961 33.804,71.961 35.328,71.961 36.852,71.961 41.424,71.961 42.948,71.961 44.472,71.961 45.996,71.961 49.044,71.961 50.568,71.961 52.092,71.961 53.616,71.961 7.134,73.485 11.706,73.485 13.23,73.485 16.278,73.485 19.326,73.485 20.85,73.485 22.374,73.485 26.946,73.485 28.47,73.485 29.994,73.485 31.518,73.485 34.566,73.485 36.09,73.485 40.662,73.485 42.186,73.485 43.71,73.485 45.234,73.485 46.758,73.485 49.806,73.485 51.33,73.485 52.854,73.485 12.468,75.009 17.04,75.009 20.088,75.009 21.612,75.009 26.184,75.009 27.708,75.009 29.232,75.009 30.756,75.009 32.28,75.009 33.804,75.009 35.328,75.009 41.424,75.009 42.948,75.009 44.472,75.009 45.996,75.009 49.044,75.009 50.568,75.009 52.092,75.009 53.616,75.009 13.23,76.533 14.754,76.533 16.278,76.533 19.326,76.533 20.85,76.533 26.946,76.533 28.47,76.533 29.994,76.533 31.518,76.533 34.566,76.533 36.09,76.533 42.186,76.533 43.71,76.533 45.234,76.533 46.758,76.533 49.806,76.533 51.33,76.533 52.854,76.533 1.8,78.057 3.324,78.057 4.848,78.057 6.372,78.057 7.896,78.057 9.42,78.057 10.944,78.057 12.468,78.057 13.992,78.057 15.516,78.057 18.564,78.057 20.088,78.057 21.612,78.057 26.184,78.057 27.708,78.057 29.232,78.057 33.804,78.057 35.328,78.057 36.852,78.057 41.424,78.057 42.948,78.057 44.472,78.057 49.044,78.057 50.568,78.057 52.092,78.057 53.616,78.057 2.562,79.581 4.086,79.581 5.61,79.581 7.134,79.581 8.658,79.581 10.182,79.581 11.706,79.581 13.23,79.581 16.278,79.581 17.802,79.581 19.326,79.581 20.85,79.581 26.946,79.581 28.47,79.581 31.518,79.581 33.042,79.581 34.566,79.581 36.09,79.581 42.186,79.581 43.71,79.581 46.758,79.581 48.282,79.581 49.806,79.581 51.33,79.581 52.854,79.581 1.8,81.105 7.896,81.105 9.42,81.105 10.944,81.105 12.468,81.105 13.992,81.105 17.04,81.105 18.564,81.105 20.088,81.105 27.708,81.105 29.232,81.105 30.756,81.105 32.28,81.105 33.804,81.105 35.328,81.105 41.424,81.105 42.948,81.105 45.996,81.105 53.616,81.105 8.658,82.629 10.182,82.629 11.706,82.629 13.23,82.629 16.278,82.629 17.802,82.629 26.946,82.629 28.47,82.629 31.518,82.629 33.042,82.629 42.186,82.629 43.71,82.629 1.8,84.153 7.896,84.153 9.42,84.153 10.944,84.153 12.468,84.153 13.992,84.153 17.04,84.153 27.708,84.153 29.232,84.153 30.756,84.153 32.28,84.153 42.948,84.153 45.996,84.153 53.616,84.153 2.562,85.677 7.134,85.677 8.658,85.677 10.182,85.677 11.706,85.677 13.23,85.677 16.278,85.677 17.802,85.677 26.946,85.677 28.47,85.677 31.518,85.677 33.042,85.677 42.186,85.677 43.71,85.677 46.758,85.677 52.854,85.677
  other v2: 19.6,30.5 21.2,30.5 34.6,30.5 36.2,30.5 38,55.4 42,55.4 27.1,55.6 22.8,55.7
NetC3_1: C3.1 R5.2 | length 1.9
  Top Layer w0.25: R5.2 C3.1
NetC4_2: C4.2 R14.2 R16.1 | length 5.8
  Top Layer w1.016: v2(3.8,31.2) C4.2
  Bottom Layer w1.016: R16.1 R14.2 cw(c2.311,30.76) 2.311,31.2 v2(3.8,31.2)
NetC5_2: C5.2 C7.1 C10.2 C13.2 R16.2 R17.1 U2.3 | length 51.3
  Top Layer w1.016: C5.2 3.2,74.1 ; C7.1 6.244,74.844 cw(c4.448,76.64) 4.448,74.1 C10.2 3.2,74.1 ; R17.1 6.844,60.744 cw(c5.048,62.54) 5.048,60 v2(2,60) cw(c2,60.4) 1.6,60.4 C13.2 1.6,66.31 cw(c3.99,66.31) 2.3,68 2.456,68.156 ccw(c0.66,69.952) 3.2,69.952 U2.3 3.2,74.1
  Bottom Layer w1.016: R16.2 v2(2,60)
NetC6_2: C6.2 R15.2 R18.1
NetC8_1: C8.1 C11.2 C14.2 R17.2 U3.3 | length 12.3
  Top Layer w1.016: R17.2 9.9,63.8 cw(c10.2,63.8) C11.2 11.4,64.1 ; U3.3 11.5,64 ccw(c11.4,64) 11.4,64.1 ; C8.1 cw(c14.6,64.5) 14.6,64.1 C14.2 11.4,64.1
NetC9_1: C9.1 C12.2 C15.2 R18.2 U4.3 | length 14.6
  Top Layer w0.508: R18.2 51,23.976 cw(c52.024,23.976) C9.1@51.089,24.394 ; C9.1 ccw(c52.024,23.976) C9.1@51.255,24.652 ; U4.3 C12.2 C15.2 51.3,24.903 cw(c50.581,24.903) C9.1@51.255,24.652 ; C9.1@51.089,24.394 ccw(c50.581,24.903) C9.1@51.255,24.652 ; C9.1@51.089,24.394 cw(c52.024,23.976) C9.1@51.255,24.652
NetC18_2: C18.2 L1.1 T1.5 | length 3.8
  Top Layer w1: L1.1 cw(c38.813,67.34) 39.977,67.34 T1.5@39.977,64.501
NetC19_2: C19.2 L1.2 L2.1 | length 3.5
  Top Layer w1: L1.2 cw(c39,70.073) 38.1,70.073 C19.2 38.1,72.127 cw(c39,72.127) L2.1
NetC20_2: C20.2 L2.2 L3.1 | length 3.5
  Top Layer w1: L2.2 ccw(c39,74.673) 39.9,74.673 C20.2 39.9,76.727 ccw(c39,76.727) L3.1
NetC21_2: C21.2 L3.2 OUT2.1 | length 10
  Top Layer w1: 37.5,82 37.5,81.749 ; OUT2.1 37.5,81.749 ; L3.2 L3.2@38.244,78.756 ; 37.5,81.749 ccw(c39.549,81.749) C21.2 38.1,79.104 ccw(c38.591,79.104) L3.2@38.244,78.756 ; 37.5,81.749 37.5,80.552 ccw(c40.04,80.552) L3.2@38.244,78.756
NetC22_2: C22.2 L4.1 T2.5 | length 4.7
  Top Layer w1: L4.1 cw(c23.759,67.286) 25,67.286 T2.5
NetC23_2: C23.2 L4.2 L5.1 | length 3.5
  Top Layer w1: L4.2 cw(c24,70.073) 23.1,70.073 C23.2 23.1,72.127 cw(c24,72.127) L5.1
NetC24_2: C24.2 L5.2 L6.1 | length 3.5
  Top Layer w1: L5.2 ccw(c24,74.673) 24.9,74.673 C24.2 24.9,76.727 ccw(c24,76.727) L6.1
NetC25_2: C25.2 L6.2 OUT3.1 | length 10
  Top Layer w1: 22.5,82 22.5,81.749 ; OUT3.1 22.5,81.749 ; L6.2 L6.2@23.244,78.756 ; 22.5,81.749 ccw(c24.549,81.749) C25.2 23.1,79.104 ccw(c23.591,79.104) L6.2@23.244,78.756 ; 22.5,81.749 22.5,80.552 ccw(c25.04,80.552) L6.2@23.244,78.756
NetDS1_1: DS1.1 R39.1 | length 3.4
  Top Layer w0.254: R39.1 ccw(c12.1,70.921) 12.185,70.835 DS1.1
NetOUT1_1: OUT1.1 R29.2 | length 4.1
  Top Layer w0.6: OUT1.1 OUT1.1@22.5,5.048 ; R29.2@23.244,6.844 R29.2
  Top Layer w1.12: OUT1.1@22.5,5.048 cw(c25.04,5.048) R29.2@23.244,6.844
NetOUT4_1: OUT4.1 R38.2 | length 4.1
  Top Layer w0.6: OUT4.1 OUT4.1@37.5,5.048 ; R38.2@38.244,6.844 R38.2
  Top Layer w1.12: OUT4.1@37.5,5.048 cw(c40.04,5.048) R38.2@38.244,6.844
NetR3_2: R3.2 U1.4 | length 9
  Top Layer w0.25: R3.2 cw(c19.9,35.6) R3.2@19.9,36 ; R3.2@19.7,36 R3.2@19.9,36 ; U1.4 26.75,37.933 cw(c26,37.933) 26,37.183 22.966,37.183 ccw(c22.966,35.534) 21.8,36.7 cw(c20.11,38.39) 20.11,36 R3.2@19.9,36
NetR4_1: R4.1 U1.17 | length 1.9
  Top Layer w0.254: U1.17 33.85,40.25 cw(c33.85,39.9) R4.1
NetR5_1: R5.1 U1.27 | length 4.4
  Top Layer w0.25: U1.27 33.038,45.25 ccw(c33.038,45.762) 33.4,45.4 cw(c33.883,44.917) 33.883,45.6 35.017,45.6 ccw(c35.017,46.283) 35.5,45.8 cw(c36.466,44.834) 36.466,46.2 R5.1
NetR21_1: R21.1 R22.2 U5.2 | length 7
  Top Layer w0.6: R22.2 cw(c23.6,23.3) 23.3,23.3 23.3,24.9 cw(c24.5,24.9) 24.5,26.1 24.5,26.115 U5.2 26.812,26.115 ccw(c26.812,27.088) R21.1
NetR21_2: R21.2 R24.1 U5.1 | length 5.2
  Top Layer w0.6: U5.1 26.909,24.845 cw(c26.909,24.009) R21.2 cw(c25.8,24.6) 25.8,22.9 R24.1
NetR22_1: R22.1 R23.2 U5.6 | length 8.4
  Top Layer w0.6: R23.2 ccw(c18.419,28.119) 18.419,27.385 U5.6 21.115,27.385 cw(c21.115,26.4) 22.1,26.4 22.1,23.3 cw(c21.8,23.3) R22.1
NetR23_1: R23.1 R25.1 U5.7 | length 6.4
  Top Layer w0.6: R25.1 cw(c19.7,24.7) 17.9,24.7 R23.1 cw(c18.66,25.04) 18.66,26.115 U5.7
NetR24_2: R24.2 R27.1 U6.2 | length 10.4
  Top Layer w0.6: R24.2 24.3,21.1 ccw(c24.3,20.135) 23.335,20.135 U6.2 23.335,17.19 ccw(c25.875,17.19) 25.875,14.65 R27.1
NetR25_2: R25.2 R26.1 U6.3 | length 10.4
  Top Layer w0.6: R26.1 19.525,14.65 ccw(c19.525,17.19) 22.065,17.19 U6.3 22.065,20.035 ccw(c21,20.035) 21,21.1 R25.2
NetR27_2: R27.2 R28.2 R29.1 | length 7.1
  Top Layer w0.6: R28.2 24.617,8.283 cw(c24.571,8.236) R29.1 25.706,9.306 ccw(c23.91,11.102) 26.45,11.102 R27.2
NetR28_1: R28.1 U6.6 | length 2.3
  Top Layer w0.6: R28.1 22.065,10.838 U6.6
NetR30_1: R30.1 R31.2 U7.2 | length 7
  Top Layer w0.6: R31.2 cw(c38.6,23.3) 38.3,23.3 38.3,24.9 cw(c39.5,24.9) 39.5,26.1 39.5,26.115 U7.2 41.812,26.115 ccw(c41.812,27.088) R30.1
NetR30_2: R30.2 R33.1 U7.1 | length 5.2
  Top Layer w0.6: U7.1 41.909,24.845 cw(c41.909,24.009) R30.2 cw(c40.8,24.6) 40.8,22.9 R33.1
NetR31_1: R31.1 R32.2 U7.6 | length 8.4
  Top Layer w0.6: R32.2 ccw(c33.419,28.119) 33.419,27.385 U7.6 36.115,27.385 cw(c36.115,26.4) 37.1,26.4 37.1,23.3 cw(c36.8,23.3) R31.1
NetR32_1: R32.1 R34.1 U7.7 | length 6.4
  Top Layer w0.6: R34.1 cw(c34.7,24.7) 32.9,24.7 R32.1 cw(c33.66,25.04) 33.66,26.115 U7.7
NetR33_2: R33.2 R36.1 U8.2 | length 10.4
  Top Layer w0.6: R33.2 39.3,21.1 ccw(c39.3,20.135) 38.335,20.135 U8.2 38.335,17.19 ccw(c40.875,17.19) 40.875,14.65 R36.1
NetR34_2: R34.2 R35.1 U8.3 | length 10.4
  Top Layer w0.6: R35.1 34.525,14.65 ccw(c34.525,17.19) 37.065,17.19 U8.3 37.065,20.035 ccw(c36,20.035) 36,21.1 R34.2
NetR36_2: R36.2 R37.2 R38.1 | length 7.1
  Top Layer w0.6: R37.2 ccw(c38.402,9.564) 38.356,9.517 R38.1 40.706,9.306 ccw(c38.91,11.102) 41.45,11.102 R36.2
NetR37_1: R37.1 U8.6 | length 2.3
  Top Layer w0.6: R37.1 37.065,10.838 U8.6
P0: DDS.2 U1.40 | length 23.8
  Top Layer w0.25: DDS.2 cw(c6.54,54.589) 7.325,55.375 13.456,49.244 ccw(c15.252,51.04) 15.252,48.5 24.5,48.5 cw(c24.5,46.75) 26.25,46.75 U1.40
P1: DDS.3 U1.41 | length 25.6
  Top Layer w0.25: DDS.3 4.496,53.656 cw(c6.292,51.86) 6.292,54.4 6.548,54.4 cw(c6.548,51.86) 8.344,53.656 13.256,48.744 ccw(c15.052,50.54) 15.052,48 24.5,48 cw(c24.5,46.75) 25.75,46.75 U1.41
P2: DDS.4 U1.42 | length 21.5
  Top Layer w0.25: DDS.4 7.088,53.16 cw(c7.088,50.62) 8.884,52.416 13.056,48.244 ccw(c14.852,50.04) 14.852,47.5 24.5,47.5 cw(c24.5,46.75) 25.25,46.75 U1.42
P3: DDS.5 U1.43 | length 23.8
  Top Layer w0.25: DDS.5 4.536,51.156 cw(c6.332,49.36) 6.332,51.9 7.648,51.9 cw(c7.648,49.36) 9.444,51.156 12.856,47.744 ccw(c14.652,49.54) 14.652,47 24,47 cw(c24,46.5) 24.5,46.5 U1.43
REFCLK: C1.2 U1.23 Y1.2 | length 24.9
  Top Layer w0.25: U1.23 45.15,43.25 ccw(c45.15,45.3) 47.2,45.3 47.2,47.2 ; Y1.2 cw(c44.847,47.324) 47.2,47.324 47.2,47.2 ; C1.2 ccw(c46.3,46) 46.3,45.6 46.4,45.6 cw(c46.4,44.895) 47.105,44.895 47.105,44.697 ; C1.2@46.4,46.4 ccw(c46.4,47.2) 47.2,47.2
REFCLKN: C2.2 U1.22 Y1.1 | length 25.6
  Top Layer w0.25: U1.22 45.26,42.75 ccw(c45.26,45.29) 47.794,45.111 ; 47.784,45.002 cw(c48.382,45.002) 47.794,45.111 ; C2.2@48.7,46.4 48.6,46.4 cw(c48.6,47.2) 47.8,47.2 ; C2.2 cw(c48.7,46) 48.7,45.6 48.382,45.6 ccw(c48.382,45.002) 47.794,45.111 ; Y1.1 ccw(c49.927,47.55) 47.8,47.55 47.8,47.2 ; 47.794,45.111 ccw(c45.26,45.29) 47.8,45.29 47.8,47.2
RESET: DDS.15 R2.2 U1.3 | length 24.7
  Top Layer w0.25: DDS.15 4.676,37.244 ccw(c6.472,39.04) 6.472,36.5 17.5,36.5 ; R2.2 17.5,36.5 ; U1.3 26.25,37.95 cw(c25.9,37.95) 25.9,37.6 22.949,37.6 ccw(c22.949,35.551) 21.5,37 cw(c20.293,38.207) 20.293,36.5 17.5,36.5
SCLK: DDS.9 U1.48 | length 22.2
  Top Layer w0.25: DDS.9 4.516,46.056 cw(c6.312,44.26) 6.312,46.8 6.648,46.8 cw(c6.648,44.26) 8.444,46.056 10.506,43.994 ccw(c12.302,45.79) 12.302,43.25 U1.48
SDIO0: DDS.12 U1.50 | length 18.2
  Top Layer w0.25: DDS.12 6.546,42.994 ccw(c8.342,44.79) 8.342,42.25 U1.50
SDIO1: DDS.11 U1.51 | length 20.9
  Top Layer w0.25: DDS.11 4.506,42.494 ccw(c6.302,44.29) 6.302,41.75 U1.51
SDIO2: DDS.14 U1.52 | length 18.2
  Top Layer w0.25: DDS.14 6.586,40.506 cw(c8.382,38.71) 8.382,41.25 U1.52
SDIO3: DDS.13 U1.53 | length 21.4
  Top Layer w0.25: DDS.13 4.516,39.944 ccw(c6.312,41.74) 6.312,39.2 6.5,39.2 ccw(c6.5,40.649) 7.524,39.624 7.906,40.006 cw(c9.702,38.21) 9.702,40.75 U1.53
UP: DDS.7 U1.46 | length 22.8
  Top Layer w0.25: DDS.7 4.476,48.556 cw(c6.272,46.76) 6.272,49.3 6.648,49.3 cw(c6.648,46.76) 8.444,48.556 12.006,44.994 ccw(c13.802,46.79) 13.802,44.25 U1.46
V+: "Power IN.1" D1.2 R14.1 R19.1 | length 38.9
  Top Layer w1.27: v2(2.8,21) v2(2.8,22.5) v2(2.8,24) 2.8,24.96 cw(c5.34,24.96) 5.34,27.5 5.5,27.5 ; v2(8,13) v2(9.5,13) ; R19.1 9.7,12.8 ccw(c9.5,12.8) v2(9.5,13) ; v2(11,13) v2(9.5,13)
  Bottom Layer w1.27: R14.1 ccw(c2.071,27.571) 2.071,27.5 5.5,27.5 D1.2 ; v2(2.8,24) v2(2.8,22.5) v2(2.8,21) 2.8,15.54 ccw(c5.34,15.54) 5.34,13 v2(8,13) v2(9.5,13) v2(11,13)
V-: "Power IN.4" D2.1 R20.1 | length 11.9
  Top Layer w1.27: R20.1 1.6,13.53 cw(c4.14,13.53) 4.14,16.07 5.5,16.07
  Bottom Layer w1.27: 5.5,16.07 5.5,16.063 D2.1
pads on no net: T1.6 T2.6 U1.1 U1.2 U1.54 U6.1 U6.5 U6.8 U8.1 U8.5 U8.8

## Polygon pours and split planes (outlines as drawn)
GND on Top Layer "Bottom Layer-No Net" (solid, remove dead copper, pour order 4): 0,0 55,0 55,88 0,88
GND on Bottom Layer "Bottom Layer-No Net" (solid, remove dead copper, pour order 3): 0,0 55,0 55,88 0,88

## Keep-outs
Keep-Out Layer:
  the board outline again, w0.254

## Other copper
Top Layer:
  rectangle net GND: 34.5,5 35.5,6.5
  rectangle net GND: 33.5,2.5 34,3.5
  rectangle net GND: 40.5,2.5 42,3.5
  rectangle net GND: 39.5,5 40.5,6
  rectangle net GND: 24.5,5 25.5,6
  rectangle net GND: 25.5,2.5 27,3.5
  rectangle net GND: 18.5,2.5 19,3.5
  rectangle net GND: 19.5,5 20.5,6.5
  rectangle net NetC6_2: 51.1,15.2 52.9,17.1
  rectangle net REFCLK: 46.8,45.5 47.2,46.6
  rectangle net REFCLK: 46.9,45.3 47.2,45.6
  rectangle net REFCLK: 46.3,45.6 46.9,46.4
  rectangle net REFCLKN: 47.8,45.5 48.1,46.7
  rectangle net REFCLKN: 48.1,45.5 48.3,46.5
  rectangle net REFCLKN: 48.2,45.6 48.7,46.4
  pour cut-out: 36.406,65.039 36.431,65.064 43.619,65.064 43.619,57 36.406,57
  pour cut-out: 21.406,65.039 21.431,65.064 28.62,65.064 28.62,57 21.406,57
  pour cut-out: 36.804,5.829 36.78,5.804 36.254,5.804 36.254,0.363 36.263,0.371 38.746,0.371 38.746,5.804
  pour cut-out: 21.804,5.829 21.78,5.804 21.254,5.804 21.254,0.363 21.263,0.371 23.746,0.371 23.746,5.804
  pour cut-out: 43.5,0 44.5,0 44.5,22 43.5,22
  pour cut-out: 29.5,0 30.5,0 30.5,22 29.5,22
  pour cut-out: 15.5,88 15.5,81.052 ccw(c18.04,81.052) 16.244,79.256 17.756,77.744 cw(c15.96,75.948) 18.5,75.948 18.5,61.5 17.5,61.5 17.5,75.448 ccw(c14.96,75.448) 16.756,77.244 15.244,78.756 cw(c17.04,80.552) 14.5,80.552 14.5,88
  pour cut-out: 45.5,88 45.5,81.052 ccw(c48.04,81.052) 46.244,79.256 47.756,77.744 cw(c45.96,75.948) 48.5,75.948 48.5,61.5 47.5,61.5 47.5,75.448 ccw(c44.96,75.448) 46.756,77.244 45.244,78.756 cw(c47.04,80.552) 44.5,80.552 44.5,88
  pour cut-out: 30.5,88 30.5,81.052 ccw(c33.04,81.052) 31.244,79.256 32.756,77.744 cw(c30.96,75.948) 33.5,75.948 33.5,61.5 32.5,61.5 32.5,75.448 ccw(c29.96,75.448) 31.756,77.244 30.244,78.756 cw(c32.04,80.552) 29.5,80.552 29.5,88
  pour cut-out: 18,0 17,0 17,10.293 ccw(c15.293,10.293) 16.5,11.5 cw(c17.707,12.707) 16,12.707 16,22 17,22 17,13.052 ccw(c19.54,13.052) 17.744,11.256 18,10.5
Bottom Layer:
  rectangle net GND: 25,39 32,47

## Silkscreen, mask and mechanical layers (free items; w line width, h text height)
Top Solder:
  rectangle: 51,50.5 52,51
  rectangle: 48.5,51 52,53
Bottom Solder:
  drawing of 339 lines, arcs and shapes, not listed

## Text inside footprints (layer, text, board x,y; h text height)
DDS: Top Overlay "1" at 3.416,58.621 h1.02 r270; Top Overlay "2" at 5.93,59.053 h1.02 r270